# Altium PCB AirshipBoard.PcbDoc
Units mm, origin at the board's own origin, x right, y up, seen from the top; angles counter-clockwise.
Board outline 73.02 x 66.12 mm, 2 copper layers (Top Layer, Bottom Layer); 91 components, 95 nets, 394 pads, 108 vias.
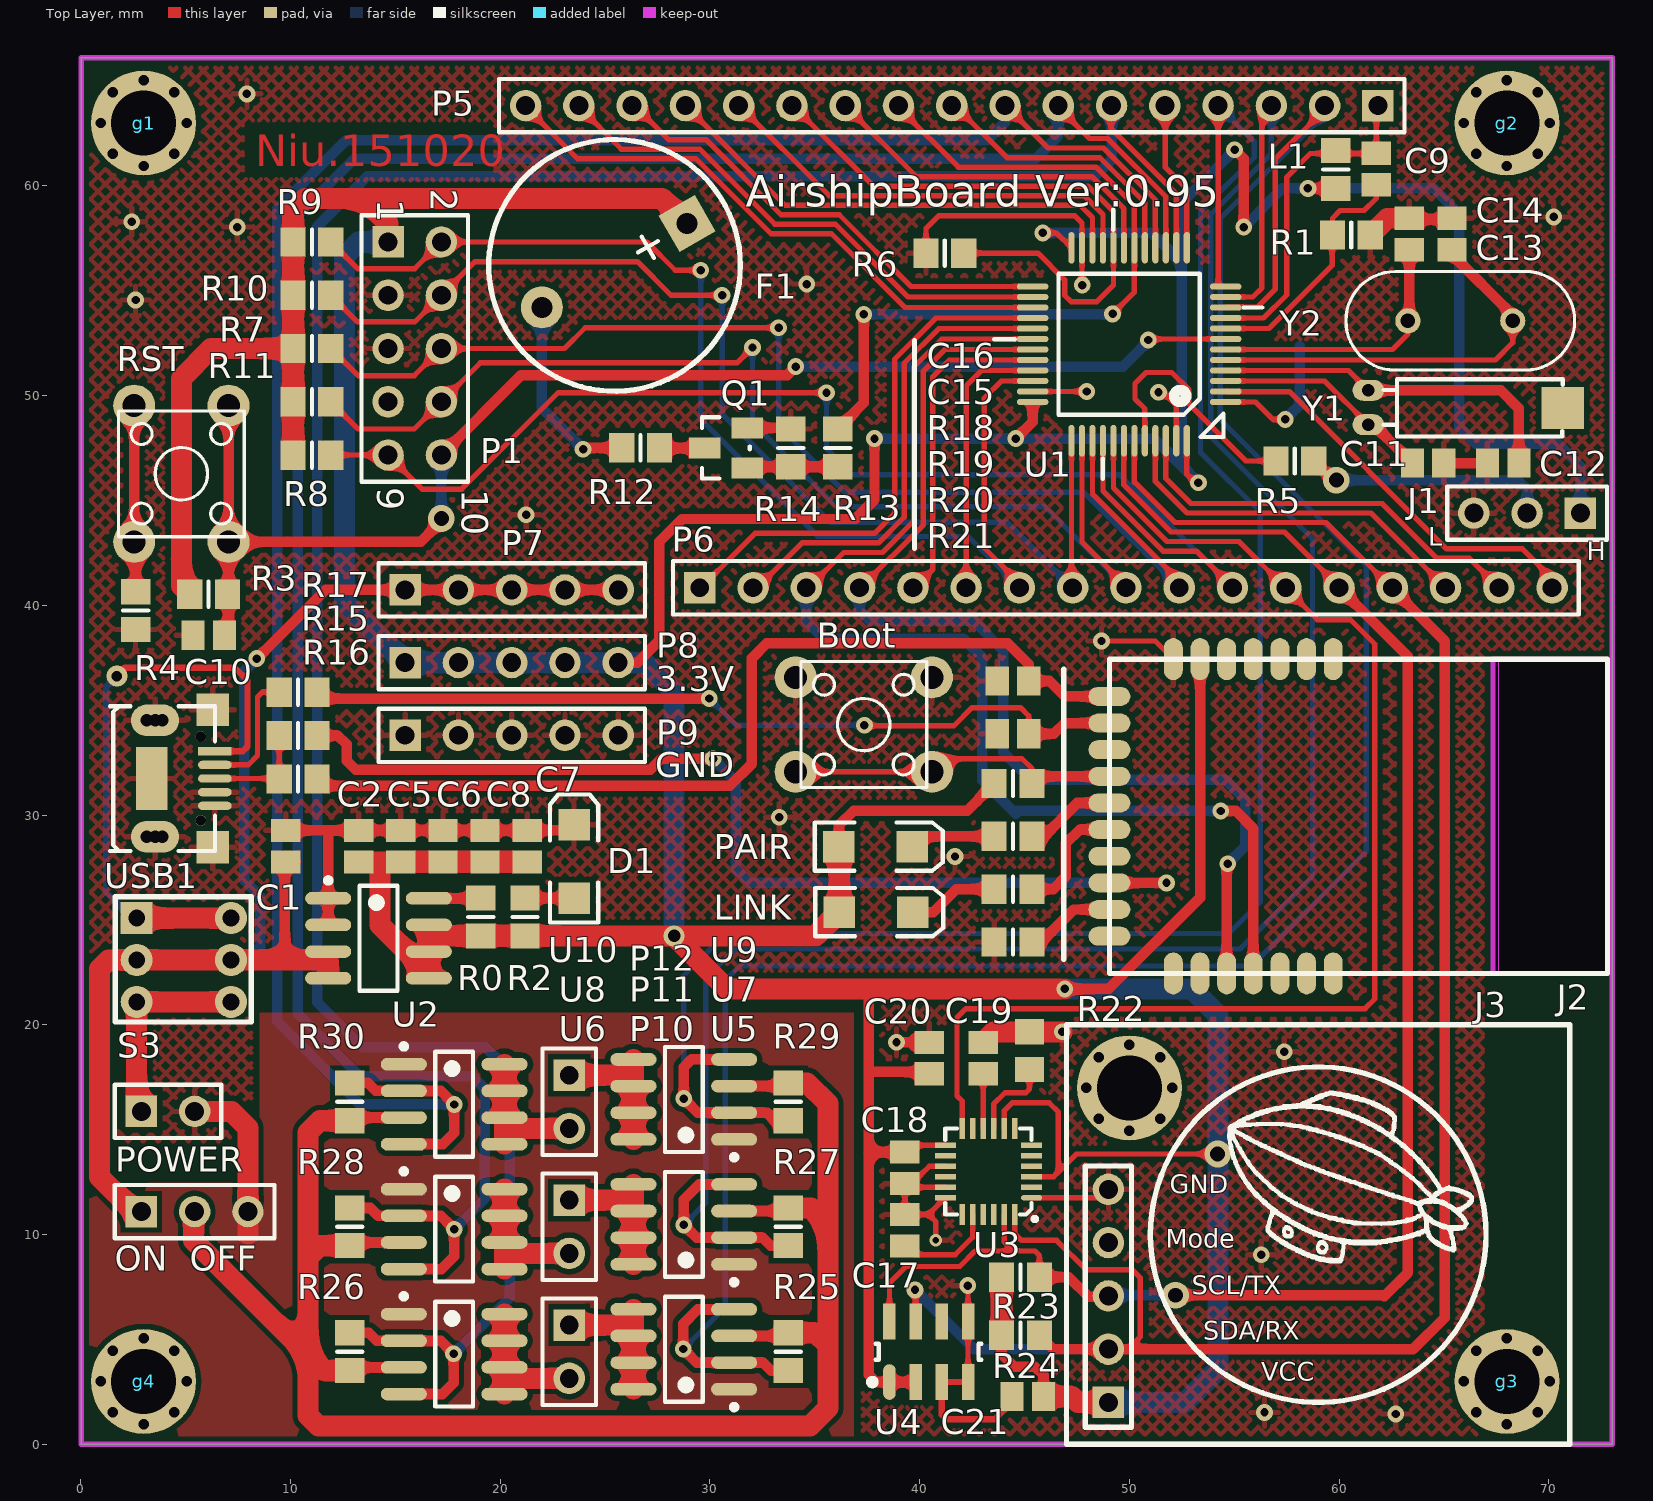
[diagram p0: Top Layer view]
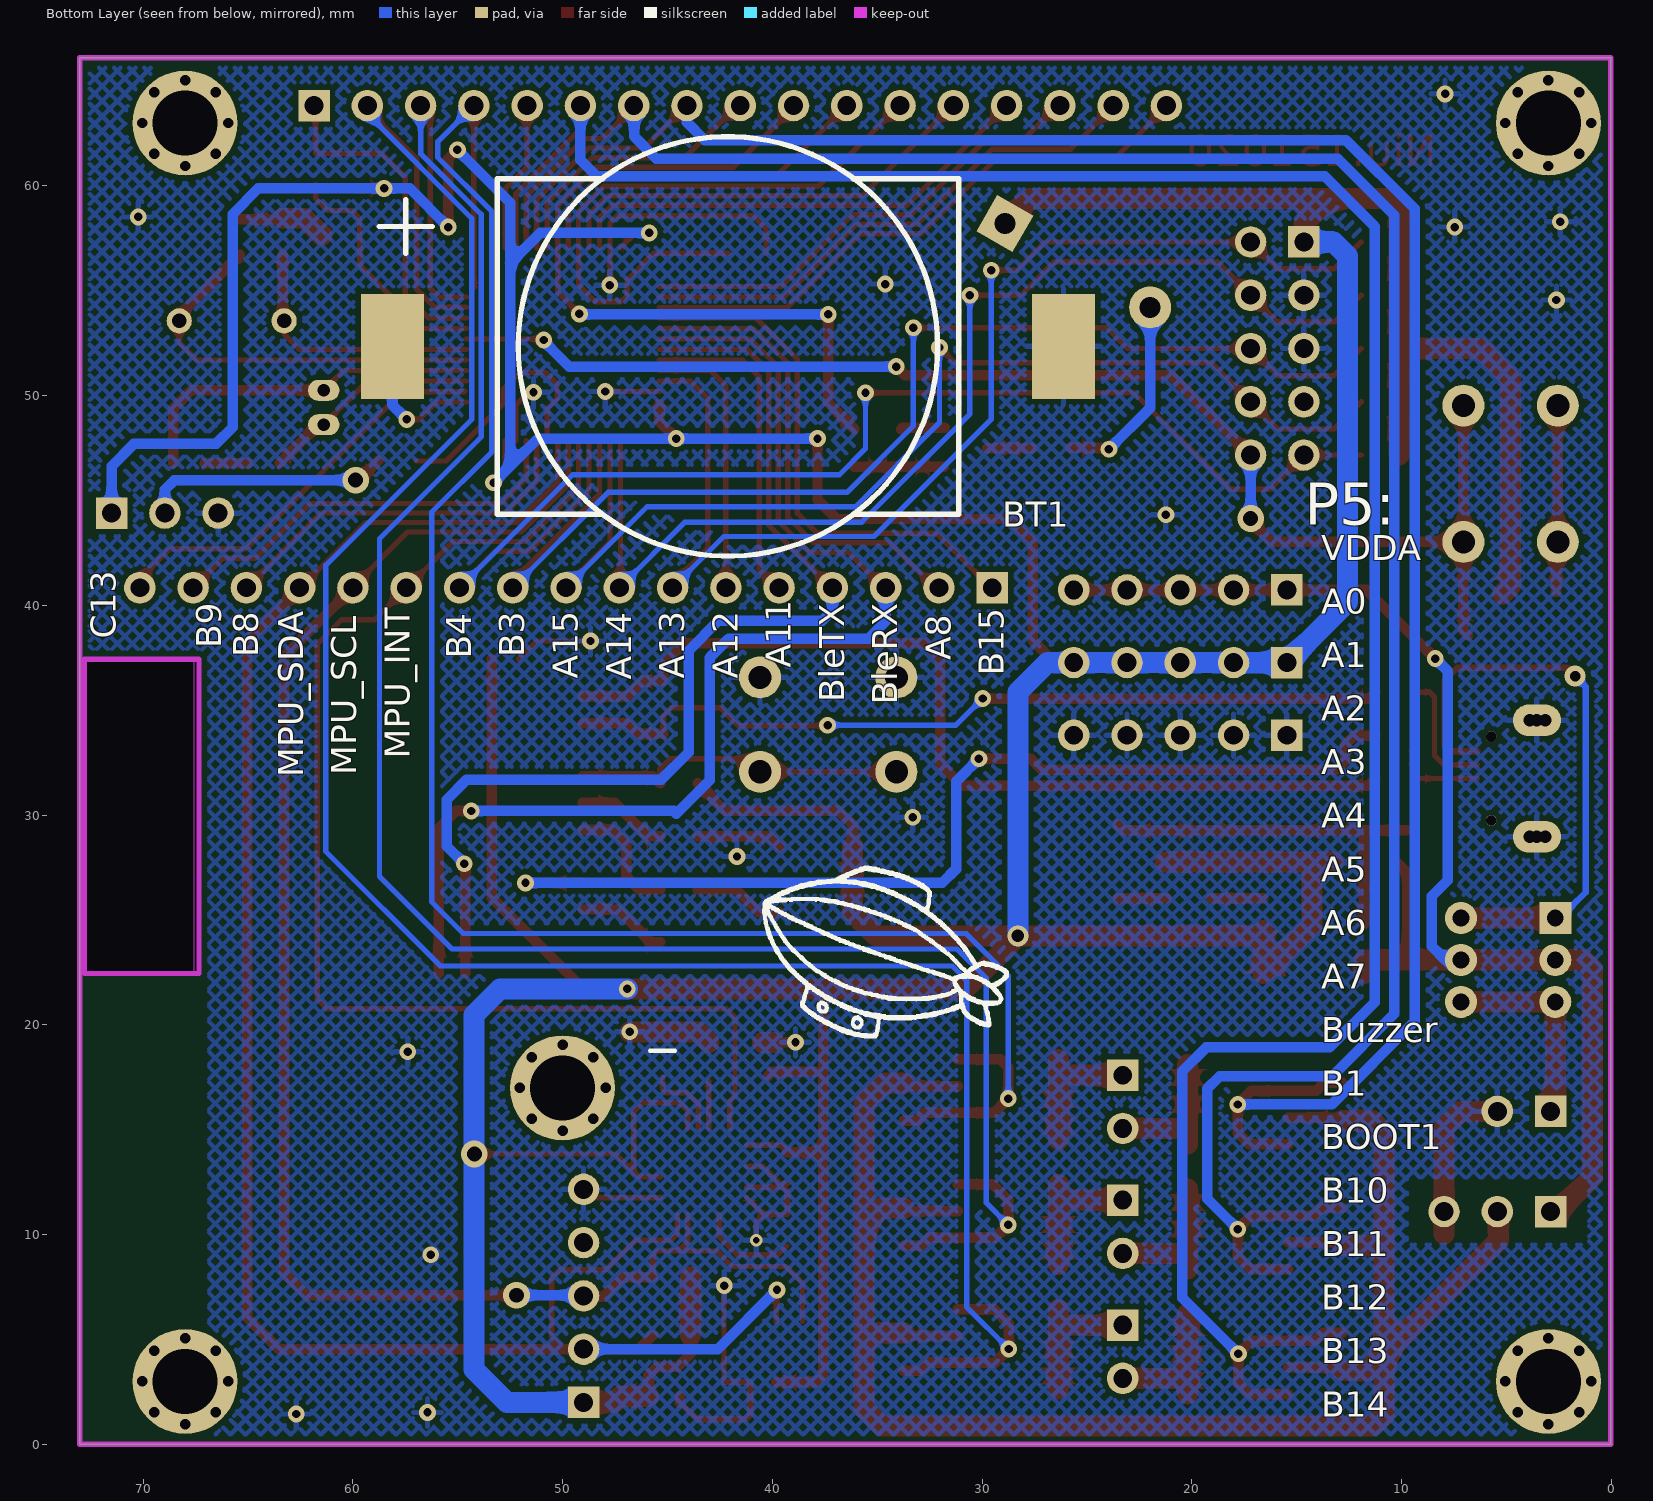
[diagram p1: Bottom Layer view, seen from below]

## Layer stack, top to bottom
Top Solder: solder mask 0.0102, Solder Resist, Dk 3.5
Top Layer: signal copper 0.0356
Dielectric 1: dielectric 0.32, FR-4, Dk 4.8
Bottom Layer: signal copper 0.0356
Bottom Solder: solder mask 0.0102, Solder Resist, Dk 3.5

## Board outline
0,0 0.025,0.025 0.025,66.116 73.025,66.116 73.025,0
cut-out: 67.589,37.44 67.589,22.454 73.05,22.454 73.05,37.44

## Design rules (kind name [scope] priority, off if disabled: settings)
Clearance [All] p1: gap=0.254
PolygonConnect [All] p1: connectstyle=Relief reliefconductorwidth=0.254 reliefentries=4 polygonreliefangle="90 Angle" airgapwidth=0.254
RoutingVias [All] p1: holewidth=0.4 width=0.8 viastyle="Through Hole" minholewidth=0.3 minwidth=0.6 maxholewidth=0.711 maxwidth=1.27
SolderMaskExpansion [All] p1: expansion=0.102
UnpouredPolygon [All] p1: allowunpoured=FALSE
Width 3.3 [InNet('3.3V')] p1: maxlimit=1 minlimit=0.254 preferedwidth=0.5
Width POWER [InNet('VCC','VCCM','VIN','5V-USB')] p2: maxlimit=1.5 minlimit=0.3 preferedwidth=1
Width Width_1 [All] p3: maxlimit=1.5 minlimit=0.254 preferedwidth=0.254
29 further rules are at their usual default settings.

## Components (designator, comment, footprint, x,y, rotation, side; value= is the part's Value field where it differs from the comment)
Boot "BOOT" SW-0606 40.335,31.318 r90 top (schematic designator S2)
BT1 "VBAT" BAT-SOT 58.115,52.349 r270 bottom
C1 "Cap Pol3" C0805 9.779,28.524 r90 top
C2 "Cap Pol3" C0805 13.259,28.524 r90 top
C5 "Cap Pol3" C0805 15.265,28.524 r90 top
C6 "Cap Pol3" C0805 17.272,28.524 r90 top
C7 "Cap Pol3" C0805 21.285,28.524 r90 top
C8 "Cap Pol3" C0805 19.279,28.524 r90 top
C9 "Cap Pol3" C0805 61.773,60.808 r270 top
C10 "Cap Pol3" C0805 6.096,38.583 r180 top
C11 "Cap Pol3" C0805 64.237,46.787 r0 top
C12 "Cap Pol3" C0805 67.818,46.787 r180 top
C13 "Cap Pol3" C0805 65.38,57.709 r90 top
C14 "Cap Pol3" C0805 63.348,57.709 r90 top
C15 "Cap Pol3" C0805 44.45,33.879 r180 top
C16 "Cap Pol3" C0805 44.45,36.398 r180 top
C17 "Cap Pol3" C0805 39.294,10.211 r90 top
C18 "Cap Pol3" C0805 39.294,13.183 r270 top
C19 "Cap Pol3" C0805 43.028,18.421 r90 top
C20 "Cap Pol3" C0805 40.462,18.421 r90 top
C21 "Cap Pol3" C0805 45.156,2.286 r180 top
D1 "Power" 3.2X1.6X1.1 23.52,27.788 r90 top
F1 "Buzzer" BELL 25.451,56.21 r30 top
g1 "固定过孔" HOLE_3MM-2#1 3,63 r0 top locked
g2 "固定过孔" HOLE_3MM-2#1 68,63 r0 top locked
g3 "固定过孔" HOLE_3MM-2#2 68,3 r0 top locked
g4 "固定过孔" HOLE_3MM-2#1 3,3 r0 top locked
J1 "Header 3" HDR1X3 71.501,44.399 r180 top
J2 "BleMicro" BleMicro 61.874,29.947 r270 top
J3 "SRF02" SRF02 71,20 r180 top locked
L1 "Inductor" 6-0805_N#1 59.842,60.782 r90 top
LINK "LINK" 3.2X1.6X1.1 37.922,25.375 r0 top (schematic designator D3)
"ON  OFF" "Header 3" HDR1X3 2.894,11.1 r0 top (schematic designator J4)
P1 "JTAG" HDR2X5 14.656,57.328 r270 top
P5 "Header 17" HDR1X17 61.849,63.83 r180 top
P6 "Header 17" HDR1X17 29.515,40.843 r0 top
P7 "Header 5" HDR1X5 15.469,40.742 r0 top
P8 "Header 5" HDR1X5 15.469,37.274 r0 top
P9 "Header 5" HDR1X5 15.469,33.807 r0 top
P10 "Motor1" HDR1X2 23.292,5.69 r270 top
P11 "Motor2" HDR1X2 23.292,11.646 r270 top
P12 "Motor3" HDR1X2 23.292,17.602 r270 top
PAIR "PAIR" 3.2X1.6X1.1 37.897,28.499 r0 top (schematic designator D2)
POWER "电源输入" HDR1X2 2.894,15.875 r0 top (schematic designator P2)
Q1 "8050" SOT-23(BEC-123) 29.743,47.498 r90 top
R0 "Res2" 6-0805_N#1 19.075,25.146 r90 top
R1 "Res2" 6-0805_N#1 60.579,57.658 r180 top
R2 "Res2" 6-0805_N#1 21.184,25.146 r90 top
R3 "Res2" 6-0805_N#1 6.096,40.538 r180 top
R4 "Res2" 6-0805_N#1 2.616,39.751 r90 top
R5 "Res2" 6-0805_N#1 57.887,46.888 r180 top
R6 "Res2" 6-0805_N#1 41.199,56.794 r0 top
R7 "Res2" 6-0805_N#1 11.024,52.248 r0 top
R8 "Res2" 6-0805_N#1 11.024,47.168 r0 top
R9 "Res2" 6-0805_N#1 11.024,57.328 r0 top
R10 "Res2" 6-0805_N#1 11.024,54.788 r0 top
R11 "Res2" 6-0805_N#1 11.024,49.708 r0 top
R12 "Res2" 6-0805_N#1 26.695,47.51 r0 top
R13 "Res2" 6-0805_N#1 36.093,47.51 r270 top
R14 "Res2" 6-0805_N#1 33.858,47.51 r90 top
R15 "Res2" 6-0805_N#1 10.363,33.795 r0 top
R16 "Res2" 6-0805_N#1 10.363,31.725 r0 top
R17 "Res2" 6-0805_N#1 10.363,35.865 r0 top
R18 "Res2" 6-0805_N#1 44.45,31.51 r180 top
R19 "Res2" 6-0805_N#1 44.45,28.991 r180 top
R20 "Res2" 6-0805_N#1 44.45,26.471 r180 top
R21 "Res2" 6-0805_N#1 44.45,23.952 r180 top
R22 "Res2" 6-0805_N#2 45.237,18.771 r270 top
R23 "Res2" 6-0805_N#1 44.806,7.976 r0 top
R24 "Res2" 6-0805_N#1 44.806,5.206 r0 top
R25 "Res2" 6-0805_N#1 33.731,4.42 r90 top
R26 "Res2" 6-0805_N#1 12.827,4.42 r90 top
R27 "Res2" 6-0805_N#1 33.731,10.376 r90 top
R28 "Res2" 6-0805_N#1 12.827,10.376 r90 top
R29 "Res2" 6-0805_N#1 33.731,16.332 r90 top
R30 "Res2" 6-0805_N#1 12.827,16.332 r90 top
RST "RST" SW-0606 7.798,49.276 r180 top (schematic designator S1)
S3 "电源开关" 自锁开关-5.8*5.8 2.667,25.095 r0 top
U1 "STM32F103CBT6" LQFP48 49.987,52.451 r180 top
U2 "TPS7333-8" TPS73XX-8 14.199,24.13 r0 top
U3 "MPU9150" LCC24 43.332,13.03 r180 top
U4 "MS5611" LCC8 38.557,2.972 r90 top
U5 "SP8M4" TPS73XX-8 28.753,4.535 r180 top
U6 "SP8M4" TPS73XX-8 17.805,4.305 r0 top
U7 "SP8M4" TPS73XX-8 28.753,10.491 r180 top
U8 "SP8M4" TPS73XX-8 17.805,10.261 r0 top
U9 "SP8M4" TPS73XX-8 28.753,16.447 r180 top
U10 "SP8M4" TPS73XX-8 17.805,16.217 r0 top
USB1 "MicroUSB" MICROUSB_D2S6 4.365,31.902 r90 top
Y1 "32.768K" OSC_3X8d 61.392,48.616 r0 top
Y2 "8M" XTAL-HC49S 68.275,53.569 r180 top

## Footprints (in the part's own frame and the unit in brackets; to place one, negate y for a bottom-side part, rotate by r counter-clockwise, add the part's x,y. Pads: shape width x height; smd on the part's side, far side on the other; paste and mask are expansions set on the pad)
3.2X1.6X1.1 [mm] "SMT LED; 2 Flat Leads"
  rect 1.5x1.5 smd: 1(-1.75,0) 2(1.75,0)
  silkscreen extent -2.9,-1.15 3.2,1.15
6-0805_N#1 [mm] "Chip Resistor, Body 2.0x1.2mm, IPC Medium Density"
  rect 1.2x1.4 smd: 1(-0.9,0) 2(0.9,0)
  silkscreen extent 0,-0.6 0,0.6, body extent -1.07,-0.7 1.07,0.7, height 0.7
6-0805_N#2 [mm] "Chip Resistor, Body 2.0x1.2mm, IPC Medium Density"
  rect 1.2x1.4 smd: 1(0.9,0) 2(-0.9,0)
  body extent -1.07,-0.7 1.07,0.7, height 0.7
BAT-SOT [mm] "贴片封装"
  rect 5x3 smd: 1(0,0) 2(0,32)
  silkscreen extent -10,-0.63 10,27
BELL [mm]
  rect 2x2 hole 1: 1(4,0)
  round 2 hole 1: 2(-4,0)
  silkscreen extent -6,-6 6,6, body extent -6,-5.94 6,6.06, height 9.3
BleMicro [mm]
  oval 2x0.9 smd: 1(-7.493,-2.159) 2(-7.493,-3.429) 3(-7.493,-4.699) 4(-7.493,-5.969) 5(-7.493,-7.239) 6(-7.493,-8.509) 7(-7.493,-9.779) 18(7.493,-9.779) 19(7.493,-8.509) 20(7.493,-7.239) 21(7.493,-5.969) 22(7.493,-4.699) 23(7.493,-3.429) 24(7.493,-2.159)
  oval 0.9x2 smd: 8(-5.715,-12.827) 9(-4.445,-12.827) 10(-3.175,-12.827) 11(-1.905,-12.827) 12(-0.635,-12.827) 13(0.635,-12.827) 14(1.905,-12.827) 15(3.175,-12.827) 16(4.445,-12.827) 17(5.715,-12.827)
  Keep-Out Layer board cut-out: -7.493,10.922 -7.493,5.461 7.493,5.461 7.493,10.922
  Keep-Out Layer lines w0.254: 7.493,5.461 7.493,10.922 -7.493,10.922 -7.493,5.461 7.493,5.461
  silkscreen extent -7.49,-12.83 7.49,10.92
C0805 [mm] "Chip Capacitor, Body 2.0x1.3mm, IPC High Density"
  rect 1.1x1.4 smd: 1(-0.75,0) 2(0.75,0)
  body extent -1.1,-0.72 1.1,0.72, height 1.4
HDR1X2 [mm] "Connector; Header; 2 Position"
  rect 1.5x1.5 hole 0.9: 1(0,0)
  round 1.5 hole 0.9: 2(2.54,0)
  silkscreen extent -1.27,-1.27 3.81,1.27
HDR1X3 [mm] "Connector; Header; 3 Position"
  rect 1.5x1.5 hole 0.9: 1(0,0)
  round 1.5 hole 0.9: 2(2.54,0) 3(5.08,0)
  silkscreen extent -1.27,-1.27 6.35,1.27
HDR1X5 [mm] "Connector; Header; 5 Position"
  rect 1.5x1.5 hole 0.9: 1(0,0)
  round 1.5 hole 0.9: 2(2.54,0) 3(5.08,0) 4(7.62,0) 5(10.16,0)
  silkscreen extent -1.27,-1.27 11.43,1.27
HDR1X17 [mm] "Connector; Header; 17 Position"
  rect 1.5x1.5 hole 0.9: 1(0,0)
  round 1.5 hole 0.9: 2(2.54,0) 3(5.08,0) 4(7.62,0) 5(10.16,0) 6(12.7,0) 7(15.24,0) 8(17.78,0) 9(20.32,0) 10(22.86,0) 11(25.4,0) 12(27.94,0) 13(30.48,0) 14(33.02,0) 15(35.56,0) 16(38.1,0) 17(40.64,0)
  silkscreen extent -1.27,-1.27 41.91,1.27
HDR2X5 [mm] "Connector; Header; 5x2 Position"
  rect 1.5x1.5 hole 0.9: 1(0,0)
  round 1.5 hole 0.9: 2(0,2.54) 3(2.54,0) 4(2.54,2.54) 5(5.08,0) 6(5.08,2.54) 7(7.62,0) 8(7.62,2.54) 9(10.16,0) 10(10.16,2.54)
  silkscreen extent -1.27,-1.27 11.43,3.81
HOLE_3MM-2#1 [mm]
  round 5 hole 3.1: 1(0,0)
HOLE_3MM-2#2 [mm]
  round 5 hole 3.1: ""(0,0)
LCC8 [mm]
  oval 1.7x0.6 smd: 1(0,0)
  rect 1.7x0.6 smd: 2(0,-1.25) 3(0,-2.5) 4(0,-3.75) 5(2.886,-3.75) 6(2.886,-2.5) 7(2.886,-1.25) 8(2.886,0)
  Top Layer pour cut-out: 0,0 0,-3.81 2.921,-3.81 2.921,0
  silkscreen extent -0.15,-4.39 1.83,0.96
LCC24 [mm]
  oval 1x0.25 smd: 1(-2.001,1.27)
  rect 1x0.25 smd: 2(-2.001,0.77) 3(-2.001,0.27) 4(-2.001,-0.23) 5(-2.001,-0.73) 6(-2.001,-1.23) 13(2.109,-1.23) 14(2.109,-0.73) 15(2.109,-0.23) 16(2.109,0.27) 17(2.109,0.77) 18(2.109,1.27)
  rect 0.25x1 smd: 7(-1.196,-2.035) 8(-0.696,-2.035) 9(-0.196,-2.035) 10(0.304,-2.035) 11(0.804,-2.035) 12(1.304,-2.035) 19(1.304,2.075) 20(0.804,2.075) 21(0.304,2.075) 22(-0.196,2.075) 23(-0.696,2.075) 24(-1.196,2.075)
  Top Layer pour cut-out: -1.446,2.075 -2.001,1.52 -2.001,-1.48 -1.446,-2.035 -1.446,-2.035 1.554,-2.035 2.109,-1.48 2.109,1.52 1.554,2.075
  silkscreen extent -2.26,-2.03 2.11,2.39
LQFP48 [mm]
  oval 1.5x0.3 smd: 1(-4.6,2.75) 2(-4.6,2.25) 3(-4.6,1.75) 4(-4.6,1.25) 5(-4.6,0.75) 6(-4.6,0.25) 7(-4.6,-0.25) 8(-4.6,-0.75) 9(-4.6,-1.25) 10(-4.6,-1.75) 11(-4.6,-2.25) 12(-4.6,-2.75) 25(4.6,-2.75) 26(4.6,-2.25) 27(4.6,-1.75) 28(4.6,-1.25) 29(4.6,-0.75) 30(4.6,-0.25) 31(4.6,0.25) 32(4.6,0.75) 33(4.6,1.25) 34(4.6,1.75) 35(4.6,2.25) 36(4.6,2.75)
  oval 0.3x1.5 smd: 13(-2.75,-4.6) 14(-2.25,-4.6) 15(-1.75,-4.6) 16(-1.25,-4.6) 17(-0.75,-4.6) 18(-0.25,-4.6) 19(0.25,-4.6) 20(0.75,-4.6) 21(1.25,-4.6) 22(1.75,-4.6) 23(2.25,-4.6) 24(2.75,-4.6) 37(2.75,4.6) 38(2.25,4.6) 39(1.75,4.6) 40(1.25,4.6) 41(0.75,4.6) 42(0.25,4.6) 43(-0.25,4.6) 44(-0.75,4.6) 45(-1.25,4.6) 46(-1.75,4.6) 47(-2.25,4.6) 48(-2.75,4.6)
  silkscreen extent -6.35,-6.42 6.44,6.42, body extent -4.53,-4.51 4.5,4.51, height 1.75
MICROUSB_D2S6 [mm]
  round 0.5 hole 0.5: 0(-2.157,-1.357) 0(1.843,-1.357)
  rect 0.4x1.6 smd: 1(1.143,-2.032)
  oval 0.4x1.6 smd: 2(0.493,-2.032) 3(-0.157,-2.032) 4(-0.807,-2.032) 5(-1.457,-2.032)
  rect 1.55x1.55 smd: 6(-3.429,-1.929) 6(3.124,-1.929)
  round 0.8 hole 0.6: 6(-2.932,0.468) 6(-2.932,1.218) 6(2.618,0.468) 6(2.618,1.218)
  oval 1.5x2.3 hole 0.6: 6(-2.932,0.818) 6(2.618,0.818)
  rect 3x1.5 smd: 6(-0.157,0.968)
  silkscreen extent -3.61,-2.03 3.29,2.97
OSC_3X8d [mm]
  oval 1.5x1 hole 0.6: 1(0,0) 2(0,1.64)
  rect 2.032x2 smd: 3(9.271,0.787)
  silkscreen extent 0.74,-0.56 9.27,2.17
SOT-23(BEC-123) [mm]
  rect 1x1.5 smd: B(-0.941,-2.032) C(0,0) E(0.964,-2.032)
  Top Layer pour cut-out: 1.25,0.4 1.25,-2.65 -1.3,-2.65 -1.3,0.4
  silkscreen extent -1.45,-2.16 1.47,0.13, body extent -1.45,-2.42 1.45,0.38, height 1.2
SRF02 [mm]
  rect 1.5x1.5 hole 0.9: 1(22,18)
  round 1.5 hole 0.9: 2(22,15.46) 3(22,12.92) 4(22,10.38) 5(22,7.84)
  round 5 hole 3.1: ""(3,17) ""(21,3)
  silkscreen extent 0,0 24,20
SW-0606 [mm]
  round 2 hole 1.1: 1(0.75,-0.25) 1(0.75,6.25) 2(5.25,6.25) 2(5.25,-0.25)
  silkscreen extent 0,0 6,6, body extent -0.25,-1.13 6.25,7.13, height 5
TPS73XX-8 [mm] "SOIC, 8-Leads, Body 4.9x3.9mm, Pitch 1.27mm, IPC Medium Density"
  oval 2.2x0.6 smd: 1(-2.4,1.905) 2(-2.4,0.635) 3(-2.4,-0.635) 4(-2.4,-1.905) 5(2.4,-1.905) 6(2.4,-0.635) 7(2.4,0.635) 8(2.4,1.905)
  silkscreen extent -2.52,-2.5 0.9,2.88, body extent -2,-2.5 2,2.5, height 1.75
XTAL-HC49S [mm]
  round 1.2 hole 0.7: 1(0,0) 2(5,0)
  silkscreen extent -2.95,-2.35 7.95,2.35, body extent -3.18,-2.32 8.18,2.33, height 3.5
自锁开关-5.8*5.8 [mm]
  rect 1.524x1.524 hole 0.8: 1(0,0)
  round 1.524 hole 0.8: 2(0,-2) 3(0,-4) 4(4.5,-4) 5(4.5,-2) 6(4.5,0)
  silkscreen extent -1.02,-4.95 5.46,1.02

## Part data
Boot RST: library part SW-PB, "Switch"
BT1: library part BAT, "Battery/VBAT"
C1 C2 C5 C6 C7 C8 C9 C10 C11 C12 C13 C14 C15 C16 C17 C18 C19 C20 C21: "Polarized Capacitor (Surface Mount)"
D1 LINK PAIR: library part LED2, "Typical RED, GREEN, YELLOW, AMBER GaAs LED"
F1: library part BELL
g1 g2 g3 g4: library part g固定过孔
J1 "ON  OFF": "Header, 3-Pin"
P1: library part "Header 5X2", "Header, 5-Pin, Dual row"
P5 P6: "Header, 17-Pin"
P7 P8 P9: "Header, 5-Pin"
P10 P11 P12 POWER: library part "Header 2", "USART"
Q1: library part NPN
R0 R1 R2 R3 R4 R5 R6 R7 R8 R9 R10 R11 R12 R13 R14 R15 R16 R17 R18 R19 R20 R21 R22 R23 R24 R25 R26 R27 R28 R29 R30: "Resistor"
S3: library part 自锁开关
U1: library part STM32F103C8T6, "LQFP48"
U2: library part TPS73XX-8
USB1: library part USB, "USB"
Y1 Y2: library part J晶振-3

## Via types
v1: diameter 0.8, hole 0.4, Top Layer to Bottom Layer, 53 vias
v2: diameter 0.6, hole 0.5, Top Layer to Bottom Layer, 48 vias
v3: diameter 1.27, hole 0.711, Top Layer to Bottom Layer, 4 vias
v4: diameter 1, hole 0.6, Top Layer to Bottom Layer, 1 vias
v5: diameter 1, hole 0.5, Top Layer to Bottom Layer, 1 vias
v6: diameter 0.6, hole 0.3, Top Layer to Bottom Layer, 1 vias

## Nets (pads, with @x,y where several pads share a name; then routed paths per layer and width w, separated by ;. In a path a pad name is that pad's centre, name@x,y a point inside that pad or via, vN(x,y) a via of type N, cw(c..) or ccw(c..) an arc to the next point about the centre after c; other vN are vias at no path point)
3.3V: C2.1 C5.1 C6.1 C7.1 C8.1 C18.1 C20.1 C21.1 F1.1 J1.1 J2.6 J3.1 L1.1 LINK.1 P1.1 P8.1 P8.2 P8.3 P8.4 P8.5 PAIR.1 R0.1 R2.1 R3.2 R7.1 R8.1 R9.1 R10.1 R11.1 R18.2 R23.1 R24.1 U1.24 U1.36 U1.48 U2.5 U2.6 U2.7 U3.3 U3.8 U3.13 U4.1 U4.2 | length 373.4
  Top Layer w0.254: C18.1@39.243,13.933 39.571,14.26 U3.13 ; U3.8 44.028,15.9 44.409,16.281 46.177,16.281 46.609,15.85 46.609,12.979 ; U3.3 46.39,12.76 46.609,12.979 ; v1(45.872,57.76) 46.529,57.76 U1.24 ; U1.48 52.737,46.247 53.137,45.847 v1(53.289,45.847) ; v3(54.204,13.843) 47.473,13.843 46.609,12.979
  Top Layer w0.5: P8.5 26.53,37.274 27.584,38.329 27.584,43.028 28.677,44.12 36.932,44.12 37.846,45.034 v1(37.846,47.955) ; PAIR.1 36.147,29.517 36.847,30.218 42.258,30.218 R18.2 ; 37.694,21.717 37.567,21.59 37.567,13.933 ; 37.821,17.755 40.023,17.755 C20.1@40.2,17.577 ; C18.1 39.243,13.933 37.567,13.933 ; U4.2 U4.1 37.922,2.972 37.567,3.327 37.567,13.933 ; R24.1 43.906,4.304 44.501,3.708 45.491,3.708 45.906,3.294 C21.1 ; v1(44.577,47.955) 45.387,48.765 U1.36@45.387,49.59 ; v1(46.914,21.717) 49.022,21.717 53.365,26.06 J2.6 ; v1(55.016,61.722) 55.448,61.29 v1(55.448,58.039) ; v1(58.511,59.882) L1.1
  Top Layer w1: R3.2 4.801,40.934 4.801,50.825 6.223,52.248 R7.1 ; R8.1 R11.1 R7.1 ; 10.124,56.148 R9.1 ; C2.1 14.275,27.774 ; P1.1 14.656,58.217 13.462,59.411 ; U2.7@16.599,24.511 U2.6 16.599,22.441 14.275,24.765 14.275,27.774 ; 17.107,24.257 17.118,24.246 R0.1 R2.1 35.044,24.246 LINK.1 36.172,28.473 PAIR.1 ; C7.1 C8.1 C6.1 C5.1 14.275,27.774 ; v4@28.281,24.246 30.81,21.717 37.694,21.717 v1(46.914,21.717) ; F1.1 27.715,59.411 13.462,59.411 ; R24.1 R23.1 ; C21.1 47.269,2.286 47.555,2 J3.1 ; R7.1 R10.1 R9.1 ; R9.1 10.124,58.841 10.693,59.411 13.462,59.411
  Bottom Layer w0.5: v1(37.846,47.955) v1(44.577,47.955) 51.181,47.955 52.502,46.634 ; v1(45.872,57.76) 51.054,57.76 52.502,56.312 ; v1(53.289,45.847) 52.502,46.634 ; v1(55.016,61.722) 52.502,59.207 52.502,56.312 ; v1(55.448,58.039) 57.291,59.882 v1(58.511,59.882) 64.502,59.882 65.735,58.649 65.735,48.489 66.523,47.701 70.434,47.701 71.501,46.634 J1.1@71.501,44.323 ; 52.502,46.634 52.502,56.312
  Bottom Layer w1: P1.1 13.233,57.328 12.573,56.667 12.573,40.17 P8.1 P8.2 P8.3 P8.4 P8.5 26.886,37.274 28.296,35.865 v4(28.296,24.246) ; v1(46.914,21.717) 52.984,21.717 54.229,20.472 54.229,3.581 52.648,2 J3.1
5V_USB: S3.1 S3.6 USB1.1 | length 28.2
  Top Layer w0.3: v5(1.727,36.627) 1.727,36.678 2.083,37.033 7.341,37.033 7.95,36.424 7.95,33.274 7.722,33.045 USB1.1
  Top Layer w1: S3.1@2.44,25.095 S3.6@6.94,25.095
  Bottom Layer w0.3: v5(1.727,36.627) 1.219,36.119 1.219,26.316 S3.1@2.44,25.095
A0: P5.2 R25.1 U1.10 U5.2 U5.4 | length 113.8
  Top Layer w0.254: U1.10 54.61,54.224 56.104,54.224 56.947,55.067 56.947,61.29 59.36,63.703 P5.2@59.36,63.805
  Top Layer w0.5: U5.4 29.427,6.44 28.727,5.74 v1(28.727,4.547) 29.374,3.9 U5.2 32.549,3.9 32.929,3.52 R25.1
  Bottom Layer w0.254: v1(28.727,4.547) 30.734,6.553 30.734,22.123 31.42,22.809 55.829,22.809 61.29,28.27 61.29,41.91 54.331,48.87 54.331,58.457 59.309,63.435 P5.2
A1: P5.3 R27.1 U1.11 U7.2 U7.4 | length 103.2
  Top Layer w0.254: U1.11 55.88,54.701 56.312,55.133 56.312,63.373 P5.3 ; P5.3@56.794,63.83 P5.3@56.794,63.881
  Top Layer w0.5: U7.4 29.49,12.396 28.753,11.659 v1(28.753,10.465) 29.362,9.856 U7.2 32.511,9.856 32.891,9.476 R27.1
  Bottom Layer w0.254: v1(28.753,10.465) 29.794,11.506 29.794,22.225 31.191,23.622 55.27,23.622 58.725,27.076 58.725,43.18 53.877,48.028 53.877,58.645 56.769,61.537 P5.3
A2: P5.4 R29.1 U1.12 U9.2 U9.4 | length 93.9
  Top Layer w0.254: U1.12@54.178,55.194 54.229,55.245 P5.4
  Top Layer w0.5: U9.4 29.122,18.352 28.753,17.983 v1(28.753,16.485) 29.425,15.812 U9.2 32.727,15.812 33.107,15.432 R29.1
  Bottom Layer w0.254: v1(28.753,16.485) 28.753,22.352 30.759,24.359 54.737,24.359 56.236,25.857 56.236,44.45 53.391,47.295 53.391,58.801 55.956,61.366 55.956,62.103 P5.4
A3: P5.5 U1.13 | length 7.2
  Top Layer w0.254: P5.5@51.714,63.779 51.714,60.884 52.737,59.861 U1.13
A4: P5.6 R26.2 U1.14 U6.2 U6.4 | length 121.4
  Top Layer w0.254: P5.6@49.124,63.957 49.124,62.738 52.237,59.624 U1.14
  Top Layer w0.5: R26.2 13.73,5.32 14.11,4.94 U6.2 17.158,4.94 v1(17.78,4.318) 17.78,2.946 17.233,2.4 U6.4
  Bottom Layer w0.5: v1(17.78,4.318) 20.447,6.985 20.447,17.78 19.304,18.923 13.437,18.923 11.278,21.082 11.278,58.064 13.665,60.452 48.362,60.452 49.149,61.239 P5.6
A5: P5.7 R28.2 U1.15 U8.2 U8.4 | length 113.8
  Top Layer w0.254: P5.7@46.584,63.779 48.105,62.258 48.961,62.258 51.737,59.482 U1.15
  Top Layer w0.5: R28.2 13.794,11.276 14.174,10.896 U8.2 17.171,10.896 v1(17.805,10.262) 17.805,8.966 17.195,8.356 U8.4
  Bottom Layer w0.5: v1(17.805,10.262) 19.253,11.709 19.253,16.967 18.669,17.551 13.31,17.551 10.338,20.523 10.338,58.598 13.041,61.301 45.528,61.301 46.584,62.357 46.584,63.805 P5.7
A6: P5.8 R30.2 U1.16 U10.2 U10.4 | length 106.8
  Top Layer w0.254: P5.8@43.993,63.932 46.12,61.804 48.773,61.804 51.237,59.34 U1.16
  Top Layer w0.5: R30.2 13.68,17.232 14.06,16.852 U10.2 17.158,16.852 v1(17.805,16.205) 17.805,14.859 17.259,14.312 U10.4
  Bottom Layer w0.5: v1(17.805,16.205) 13.335,16.205 9.373,20.168 9.373,58.903 12.649,62.179 43.22,62.179 44.069,63.029 P5.8
A7: P5.9 U1.17 | length 13.3
  Top Layer w0.254: P5.9@41.554,63.957 44.161,61.35 48.585,61.35 50.737,59.198 U1.17
A8: P6.2 U1.29 | length 22.8
  Top Layer w0.254: P6.2@32.08,40.665 34.395,42.98 38.034,42.98 39.265,44.211 39.265,51.552 40.914,53.201 U1.29
A11: P6.5 U1.32 | length 15.5
  Top Layer w0.254: P6.5@39.7,40.996 39.903,40.996 40.627,41.719 40.627,50.914 41.414,51.701 U1.32
A12: P6.6 U1.33 | length 13.3
  Top Layer w0.254: P6.6@42.215,40.665 P6.6 42.215,50.47 42.946,51.201 U1.33
A13: P1.2 P6.7 R9.2 U1.34 | length 57.1
  Top Layer w0.254: R9.2 13.194,56.058 15.926,56.058 P1.2 27,57.328 28.346,55.982 v1(29.566,55.982) ; P6.7@44.679,40.996 44.679,41.148 43.078,42.748 43.078,49.886 43.894,50.701 U1.34
  Bottom Layer w0.254: v1(29.566,55.982) 29.566,48.87 35.154,43.282 42.316,43.282 P6.7
A14: P1.4 P6.8 R10.2 U1.37 | length 53.7
  Top Layer w0.254: R10.2 13.194,53.518 15.926,53.518 P1.4 18.796,56.388 26.543,56.388 28.143,54.788 v1(30.582,54.788) ; U1.37 47.237,41.129 P6.8@47.32,41.046
  Bottom Layer w0.254: v1(30.582,54.788) 30.582,49.124 35.738,43.967 44.171,43.967 P6.8
A15: P1.8 P6.9 R11.2 U1.38 | length 54.6
  Top Layer w0.254: R11.2 13.219,48.412 15.9,48.412 P1.8 19.05,51.562 31.293,51.562 v1(32.029,52.299) ; U1.38 47.737,43.017 P6.9@49.784,40.97
  Bottom Layer w0.254: v1(32.029,52.299) 32.029,48.717 36.043,44.704 45.974,44.704 P6.9
B1: P5.11 U1.19 | length 17.3
  Top Layer w0.254: P5.11@36.373,63.906 P5.11 39.837,60.442 48.209,60.442 49.737,58.914 U1.19
B3: P1.6 P6.10 R7.2 U1.39 | length 58.7
  Top Layer w0.254: R7.2 13.219,50.952 15.9,50.952 P1.6 23.063,52.248 24.054,53.238 v1(33.274,53.238) ; U1.39 48.237,45.311 52.502,41.046 P6.10@52.502,40.767
  Bottom Layer w0.254: v1(33.274,53.238) 33.274,48.565 36.449,45.39 47.828,45.39 P6.10
B4: P1.9 P6.11 R8.2 U1.40 | length 61.5
  Top Layer w0.254: R8.2 P1.9 16.281,45.542 18.161,45.542 22.758,50.14 v1(35.56,50.14) ; U1.40 48.737,45.453 51.601,42.59 53.194,42.59 P6.11@54.966,40.818
  Bottom Layer w0.254: v1(35.56,50.14) 35.56,47.473 36.805,46.228 49.53,46.228 P6.11
B8: P6.15 U1.45 | length 17.9
  Top Layer w0.254: U1.45 51.237,45.911 52.742,44.406 61.512,44.406 P6.15
B9: P6.16 U1.46 | length 19.8
  Top Layer w0.254: U1.46 51.737,46.053 52.93,44.86 62.049,44.86 64.665,42.243 66.215,42.243 P6.16
B10: P5.13 U1.21 | length 21.3
  Top Layer w0.254: P5.13@31.267,63.957 35.69,59.534 47.833,59.534 48.737,58.63 U1.21
B11: P5.14 U1.22 | length 23.1
  Top Layer w0.254: P5.14@28.778,63.881 P5.14 33.579,59.08 47.645,59.08 48.237,58.488 U1.22
B12: P5.15 U1.25 | length 22.7
  Top Layer w0.254: P5.15@26.314,63.881 26.347,63.881 28.023,62.205 29.813,62.205 33.391,58.626 36.166,58.626 39.592,55.201 U1.25
B13: P5.16 U1.26 | length 25.4
  Top Layer w0.254: P5.16@23.749,63.779 25.778,61.751 29.518,61.751 33.096,58.172 35.978,58.172 39.45,54.701 U1.26
B14: P5.17 U1.27 | length 28.3
  Top Layer w0.254: P5.17@21.107,63.881 23.692,61.297 29.33,61.297 32.908,57.718 35.79,57.718 39.308,54.201 U1.27
B15: P6.1 U1.28 | length 25.5
  Top Layer w0.254: P6.1@29.54,40.818 32.156,43.434 37.846,43.434 38.811,44.399 38.811,51.74 40.772,53.701 U1.28
BLEP0.0: J2.23
BLEP0.1: J2.22
BLEP0.4: J2.19
BLEP0.5: J2.18
BLEP0.6: J2.17
BLEP0.7: J2.16 R21.1 | length 4.3
  Top Layer w0.5: R21.1 45.796,23.952 47.346,25.502 J2.16
BLEP1.0: J2.15 R15.2 | length 49.5
  Top Layer w0.5: R15.2 12.255,33.795 12.675,33.376 12.675,32.588 13.106,32.156 27.153,32.156 27.686,32.69 v1(30.15,32.69) ; J2.15 v1(51.765,26.772)
  Bottom Layer w0.5: v1(30.15,32.69) 31.242,31.598 31.242,27.432 31.902,26.772 v1(51.765,26.772)
BLEP1.1: J2.14
BLEP1.2: J2.13 R20.1 | length 5.8
  Top Layer w0.5: R20.1 46.36,26.471 46.965,27.076 46.965,28.651 47.625,29.312 J2.13
BLEP1.3: J2.12 R19.1 | length 4.4
  Top Layer w0.5: R19.1 45.932,28.991 47.523,30.582 J2.12
BLEP1.4: Boot.1 J2.11 R18.1 | length 16.3
  Top Layer w0.254: Boot.1@34.085,32.068 40.585,32.068 41.207,32.69 44.882,32.69 45.35,32.222 R18.1
  Top Layer w0.5: R18.1 45.692,31.852 J2.11
BLEP1.5: J2.10
BLEP1.6: J2.5
BLEP1.7: J2.4
BLEP2.0: J2.3
BLEP2.1: J2.2
BLEP2.2: J2.1
BLERST: J2.24
BLERX: J2.21 P6.3 U1.30 | length 57.4
  Top Layer w0.254: P6.3@34.569,40.919 34.773,40.919 36.379,42.526 38.222,42.526 39.719,44.023 39.719,51.364 41.056,52.701 U1.30
  Top Layer w0.5: v1(54.356,30.201) 55.067,30.201 55.905,29.362 J2.21
  Bottom Layer w0.5: P6.3 34.595,39.243 35.433,38.405 42.088,38.405 42.977,37.516 42.977,31.674 44.577,30.074 44.704,30.201 v1(54.356,30.201)
BLESCL(D+): C16.1 J2.8 R16.2 | length 45.2
  Top Layer w0.5: R16.2 11.593,31.394 30.937,31.394 32.004,32.461 32.004,37.49 32.715,38.202 44.196,38.202 45.2,37.198 C16.1 46.177,36.398 46.914,35.662 J2.8
BLESDA(D-): C15.1 J2.9 R17.2 | length 40.1
  Top Layer w0.254: v1@37.313,34.265 41.631,34.265 42.494,35.128 44.806,35.128 45.2,34.734 C15.1
  Top Layer w0.5: R17.2 11.568,35.56 v1(29.972,35.56) ; C15.1 46.401,33.879 46.914,34.392 J2.9
  Bottom Layer w0.254: v1(29.972,35.56) 31.242,34.29 v1(37.363,34.29)
BLETX: J2.20 P6.4 U1.31 | length 51.8
  Top Layer w0.254: P6.4@37.186,40.869 37.207,40.869 40.173,43.835 40.173,51.176 41.199,52.201 U1.31
  Top Layer w0.5: J2.20 v1@54.635,27.635
  Bottom Layer w0.5: P6.4 37.135,39.751 37.617,39.268 42.57,39.268 43.993,37.846 43.993,32.995 45.288,31.699 54.559,31.699 55.524,30.734 55.524,28.524 v1(54.686,27.686)
BOOT0: R5.2 U1.44 | length 12
  Top Layer w0.254: U1.44 50.737,49.378 50.267,49.848 50.267,50.571 50.8,51.105 52.019,51.105 52.832,50.292 52.832,49.606 55.55,46.888 R5.2
BOOT1: P5.12 R6.2 U1.20 | length 29.9
  Top Layer w0.254: P5.12@33.934,64.059 P5.12@34.163,63.83 ; P5.12@34.061,63.729 37.802,59.988 48.021,59.988 49.237,58.772 U1.20 49.237,55.27 48.45,54.483 47.219,54.483 46.914,54.788 46.914,55.524 45.644,56.794 R6.2
BUZZER: P5.10 R13.1 U1.18 | length 36.4
  Top Layer w0.254: P5.10@39.116,63.627 41.847,60.896 48.397,60.896 50.237,59.056 U1.18 50.237,54.936 v1(49.2,53.899)
  Top Layer w0.5: R13.1 37.338,49.654 v1(37.338,53.873)
  Bottom Layer w0.5: v1(37.338,53.873) v1@49.2,53.873
C13: P6.17 U1.2 | length 19.6
  Top Layer w0.254: U1.2@54.661,50.216 54.686,50.19 57.633,50.19 65.126,42.697 68.732,42.697 70.155,41.275 P6.17
GND: "ON  OFF.3" Boot.2 BT1.2 C1.2 C2.2 C5.2 C6.2 C7.2 C8.2 C10.2 C11.2 C12.2 C13.2 C14.2 C15.2 C16.2 C17.2 C18.2 C19.2 C20.2 C21.2 D1.2 J1.3 J2.7 J3.5 P1.3 P1.5 P9.1 P9.2 P9.3 P9.4 P9.5 POWER.2 Q1.E R1.1 R4.1 R6.1 R14.2 R21.2 R22.2 U1.23 U1.35 U1.47 U2.1 U2.2 U3.1 U3.15 U3.17 U3.18 U4.3 U4.4 U4.5 U5.1 U6.1 U7.1 U8.1 U9.1 U10.1 USB1.4 USB1.5 USB1.6 | length 85.8
  Top Layer w0.254: R6.1 40.299,57.977 40.894,58.572 47.396,58.572 47.737,58.232 U1.23 47.737,55.514 v1@47.777,55.474 ; v6(40.767,9.728) 40.767,10.618 40.424,10.961 ; U3.18 40.424,10.961 ; U3.17 C18.2@39.466,12.26 ; U3.15 40.464,13.26 39.636,12.433 C18.2 C18.2@39.466,12.26 ; v1(42.291,7.569) 42.307,7.553 U4.5 U4.4 ; U3.1 48.6,11.76 J3.5 ; U1.35 v1(47.97,50.201) ; v1(48.668,38.302) 51.233,38.302 J2.7 ; v1(51.384,50.165) 51.613,50.165 52.237,49.541 U1.47 ; C18.2@39.466,12.26 39.294,12.088 C17.2 40.424,10.961
  Top Layer w0.3: U4.4 U4.3 41.057,1.412 41.275,1.194 43.586,1.194 C21.2@44.406,2.013
  Top Layer w0.5: C1.2 11.913,29.274 ; U2.2 U2.1 11.799,29.16 11.913,29.274 ; D1.2 23.257,29.274 C7.2 C8.2 C6.2 C5.2 C2.2 11.913,29.274 ; Q1.E 33.806,48.462 R14.2 ; v1(38.894,19.171) C20.2@39.91,19.171 ; C21.2@44.406,2.013 C21.2 ; C14.2@63.348,58.408 C13.2@65.38,58.408 ; C11.2 C12.2
  Top Layer w1: POWER.2 7.188,15.875 7.974,15.089 7.974,11.1 7.974,10.031 ; C20.2@39.91,19.171 C20.2 ; C19.2 43.528,19.671 R22.2 v1(46.798,19.671) ; R1.1 61.495,57.658 62.296,58.459 C14.2
  other v1: 62.7,1.448 56.439,1.524 56.286,9.042 57.379,18.72 41.681,28.031 33.299,29.896 21.234,44.323 2.616,54.559 47.752,55.27 34.62,55.321 7.468,58.039 2.438,58.293 70.231,58.522 7.925,64.389
MPU_AD0: R22.1 U3.9 | length 3.7
  Top Layer w0.254: U3.9 43.528,16.223 44.069,16.764 45.06,16.764 45.237,16.942 R22.1@45.237,17.515
MPU_CLKOUT: U3.22
MPU_ES_CL: U3.7
MPU_ES_DA: U3.6
MPU_FSYNC: U3.11
MPU_INT: P6.12 U1.41 U3.12 | length 60.4
  Top Layer w0.254: U3.12 42.028,16.366 41.783,16.612 41.783,20.345 42.215,20.777 61.239,20.777 61.697,21.234 61.697,38.151 60.528,39.319 58.953,39.319 P6.12@57.455,40.818 ; U1.41 49.237,45.595 51.789,43.044 55.229,43.044 P6.12@57.455,40.818 ; P6.12 P6.12@57.455,40.818
MPU_SCL: J3.3 P6.13 R23.2 U1.42 U3.23 U4.8 | length 79.7
  Top Layer w0.254: U4.8 38.557,7.696 39.345,8.484 41.91,8.484 42.647,9.22 44.475,9.22 ; U3.23 44.028,9.667 44.475,9.22 ; R23.2 45.706,9.006 45.491,9.22 44.475,9.22 ; U1.42 49.737,45.737 51.977,43.498 57.391,43.498 60.046,40.843 P6.13
  Top Layer w0.5: R23.2 47.117,7.976 48.057,7.036 48.956,7.036 J3.3 ; v3(52.197,7.112) 62.103,7.112 62.154,7.061 63.264,8.172 63.264,37.574 P6.13
  Bottom Layer w0.5: J3.3 49.019,7.061 49.07,7.112 v3(52.197,7.112)
MPU_SDA: J3.2 P6.14 R24.2 U1.43 U3.24 U4.7 | length 95.9
  Top Layer w0.254: v1(39.776,7.366) 39.776,7.264 39.807,7.234 U4.7 ; U3.24 44.528,10.056 44.856,9.728 46.533,9.728 47.93,8.331 50.114,8.331 50.521,7.925 50.521,5.131 49.93,4.54 ; U1.43 50.237,45.879 52.165,43.952 59.376,43.952 P6.14@62.535,40.792
  Top Layer w0.5: R24.2 46.371,4.54 J3.2 49.93,4.54 63.519,4.54 65.024,6.045 65.024,38.303 62.535,40.792 P6.14
  Bottom Layer w0.254: v1(39.776,7.366) 39.776,7.264 v1@39.827,7.214
  Bottom Layer w0.5: v1(39.776,7.366) 42.602,4.54 J3.2
MPU_SDO: U4.6
NetC11_1: C11.1 U1.3 Y1.1 | length 10.5
  Top Layer w0.254: U1.3 59.306,50.701 Y1.1
  Top Layer w0.5: Y1.1 61.658,48.616 C11.1
NetC12_1: C12.1 U1.4 Y1.2 | length 17.3
  Top Layer w0.254: U1.4 60.446,51.201 Y1.2
  Top Layer w0.5: Y1.2 67.702,50.256 68.568,49.39 C12.1
NetC13_1: C13.1 U1.5 Y2.1 | length 19.4
  Top Layer w0.254: U1.5 67.449,51.701 68.275,52.527 Y2.1
  Top Layer w0.5: C13.1@65.38,56.73 68.25,53.86 Y2.1@68.25,53.619
NetC14_1: C14.1 U1.6 Y2.2 | length 12.7
  Top Layer w0.254: U1.6 62.539,52.201 63.275,52.937 Y2.2
  Top Layer w0.5: Y2.2@63.348,53.645 C14.1@63.348,56.73
NetC17_1: C17.1 U3.20 | length 4.8
  Top Layer w0.254: C17.1@39.319,9.461 39.738,9.042 41.69,9.042 42.528,9.881 U3.20
NetC19_1: C19.1 U3.10 | length 2.3
  Top Layer w0.254: U3.10 C19.1@43.028,17.314
NetC21_2: 
NetD1_1: D1.1 R2.2 | length 2.3
  Top Layer w0.5: R2.2 23.512,26.046 D1.1
NetD2_2: PAIR.2 R19.2 | length 4.1
  Top Layer w0.5: PAIR.2 40.139,28.991 R19.2
NetD3_2: LINK.2 R20.2 | length 4.3
  Top Layer w0.5: LINK.2 40.64,25.375 41.737,26.471 R20.2
NetF1_2: F1.2 R12.1 | length 9.4
  Top Layer w0.5: v1@24.015,47.51 R12.1
  Bottom Layer w0.5: F1.2 21.987,49.413 v1(23.952,47.447)
NetJ1_2: J1.2 R5.1 | length 12
  Top Layer w0.5: R5.1 59.65,46.025 v3@59.919,46.025
  Bottom Layer w0.5: v3(59.868,45.974) 68.504,45.974 68.961,45.517 J1.2@68.961,44.323
NetP10_1: P10.1 U5.5 U5.6 U5.7 U5.8 | length 6.9
  Top Layer w1: P10.1 26.327,5.69 26.353,5.715 ; U5.8 U5.7 U5.6 26.353,5.715 ; U5.5 26.353,5.715
NetP10_2: P10.2 U6.5 U6.6 U6.7 U6.8 | length 7.1
  Top Layer w1: U6.5 U6.6 ; U6.8 U6.7 U6.6 ; P10.2 20.725,3.15 U6.6
NetP11_1: P11.1 U7.5 U7.6 U7.7 U7.8 | length 6.9
  Top Layer w1: P11.1 26.188,11.646 26.353,11.811 ; U7.8 U7.7 U7.6 26.353,11.811 ; U7.5 26.353,11.811
NetP11_2: P11.2 U8.5 U8.6 U8.7 U8.8 | length 6.9
  Top Layer w1: U8.5 20.205,9.119 ; U8.8 U8.7 U8.6 20.205,9.119 ; P11.2 20.218,9.106 20.205,9.119
NetP12_1: P12.1 U9.5 U9.6 U9.7 U9.8 | length 6.9
  Top Layer w1: P12.1 26.277,17.602 26.353,17.678 ; U9.8 U9.7 U9.6 26.353,17.678 ; U9.5 26.353,17.678
NetP12_2: P12.2 U10.5 U10.6 U10.7 U10.8 | length 6.9
  Top Layer w1: U10.5 20.205,15.062 ; U10.8 U10.7 U10.6 20.205,15.062 ; P12.2 20.205,15.062
NetQ1_B: Q1.B R13.2 R14.1 | length 4.3
  Top Layer w0.5: Q1.B@31.828,46.61 R14.1 R13.2
NetQ1_C: Q1.C R12.2 | length 2.1
  Top Layer w0.5: R12.2@27.607,47.498 Q1.C
NetR0_2: R0.2 U2.8 | length 2.5
  Top Layer w0.5: U2.8 19.064,26.035 R0.2
NetR4_2: R4.2 RST.2 | length 8.9
  Top Layer w0.5: RST.2@2.548,49.526 2.548,43.026 2.616,42.958 R4.2
NetR15_1: R15.1 R16.1 USB1.3 | length 5.1
  Top Layer w0.254: USB1.3 9.442,31.745 R16.1 R15.1
NetR17_1: R17.1 USB1.2 | length 6.1
  Top Layer w0.254: USB1.2 7.986,32.395 8.433,32.842 8.433,35.636 8.661,35.865 R17.1
NRST: C10.1 P1.10 R3.1 RST.1 U1.7 | length 64.2
  Top Layer w0.254: v1(50.902,52.654) 50.948,52.701 U1.7
  Top Layer w0.5: C10.1 7.048,38.784 RST.1@7.048,43.026 ; RST.1@7.048,49.526 RST.1@7.048,43.026 ; v3@17.094,43.917 16.204,43.026 RST.1@7.048,43.026 ; P1.10 21.013,50.985 33.688,50.985 v1(34.087,51.384)
  Bottom Layer w0.5: v3(17.196,44.145) P1.10 ; v1(34.087,51.384) 49.682,51.384 50.902,52.603 v1(50.902,52.654)
SFR_MODE: J3.4
VBAT: BT1.1 U1.1 | length 7
  Top Layer w0.254: U1.1 56.014,49.701 56.845,48.87 v1(57.429,48.87)
  Bottom Layer w0.5: v1(57.429,48.87) 58.115,49.555 BT1.1
VCC: "ON  OFF.1" C1.1 P7.1 P7.2 P7.3 P7.4 P7.5 S3.2 S3.5 U2.3 U2.4 | length 63.7
  Top Layer w0.5: v1(8.398,37.465) 11.674,40.742 P7.1 P7.2 P7.3 P7.4 P7.5 ; 9.728,23.095 9.728,27.254 C1.1@10.248,27.774
  Top Layer w1: 2.667,11.074 2.591,11.074 0.906,12.759 0.906,22.674 1.327,23.095 S3.2 9.728,23.095 11.793,23.095 11.799,23.089 U2.4@11.799,22.454
  Bottom Layer w0.5: S3.5@6.94,23.095 7.906,23.095 8.56,23.749 8.56,26.137 7.804,26.892 7.804,36.872 v1(8.398,37.465)
VCCM: "ON  OFF.2" R25.2 R26.1 R27.2 R28.1 R29.2 R30.1 U5.3 U6.3 U7.3 U8.3 U9.3 U10.3 | length 91.5
  Top Layer w0.5: R26.1 12.977,3.67 U6.3 ; R28.1 12.977,9.626 U8.3 ; R30.1 12.977,15.582 U10.3 ; U5.3 33.581,5.17 R25.2 ; U7.3 R27.2@33.581,11.126 ; U9.3 33.581,17.082 R29.2
  Top Layer w1: 5.207,11.074 5.385,10.897 5.385,9.728 10.846,4.267 ; R26.1 11.593,3.52 10.846,4.267 ; R28.1 11.406,9.476 10.846,8.915 ; R30.1 11.419,15.432 10.846,14.859 10.846,8.915 ; R25.2 35.038,5.32 35.623,4.734 ; R27.2 34.825,11.276 35.623,10.477 ; R29.2 34.635,17.232 35.623,16.243 35.623,10.477 ; 10.846,4.267 10.846,1.372 11.336,0.881 34.765,0.881 35.623,1.74 35.623,4.734 ; 10.846,4.267 10.846,8.915 ; 35.623,4.734 35.623,10.477
VDDA: C9.1 L1.2 P5.1 U1.9 | length 16
  Top Layer w0.254: U1.9 56.393,53.701 57.506,54.813 57.506,60.427 58.623,61.544 61.759,61.544 C9.1 61.773,63.754 P5.1
VIN: POWER.1 S3.3 S3.4 | length 9.8
  Top Layer w1: POWER.1@2.667,15.875 2.667,20.868 2.44,21.095 S3.4@6.94,21.095
VSSA: C9.2 R1.2 U1.8 | length 11.7
  Top Layer w0.254: U1.8 56.655,53.201 59.665,56.21 59.665,57.644 R1.2 59.679,58.46 60.046,58.826 61.189,58.826 61.773,59.411 C9.2
pads on no net: g1.1 g2.1 g3. g4.1 J3. P1.7 U3.2 U3.4 U3.5 U3.14 U3.16 U3.19 U3.21 USB1.0 Y1.3
copper on no net:
  other v2: 3,0.95 68,0.95 68,0.95 1.536,1.536 4.464,1.536 66.536,1.536 66.536,1.536 69.464,1.536 69.464,1.536 0.95,3 5.05,3 65.95,3 65.95,3 70.05,3 70.05,3 1.536,4.464 4.464,4.464 66.536,4.464 66.536,4.464 69.464,4.464 69.464,4.464 3,5.05 68,5.05 68,5.05 50,14.95 48.536,15.536 51.464,15.536 47.95,17 52.05,17 48.536,18.464 51.464,18.464 50,19.05 3,60.95 68,60.95 1.536,61.536 4.464,61.536 66.536,61.536 69.464,61.536 0.95,63 5.05,63 65.95,63 70.05,63 1.536,64.464 4.464,64.464 66.536,64.464 69.464,64.464 3,65.05 68,65.05

## Polygon pours and split planes (outlines as drawn)
GND on Top Layer "Top Layer-No Net" (hatched 45Degree grid 0.508 track 0.203, remove dead copper, pour order 37): 0.025,66.091 0.076,66.04 0.076,0 73,0 73.05,-0.051 73.05,66.091 72.949,66.192 0.127,66.192 0.025,66.091
GND on Top Layer "Top Overlay-No Net" (solid, remove dead copper, pour order 6): 0.025,12.471 0.025,0.025 0.013,0.013 0.025,0 36.855,0 36.855,20.574 8.56,20.574 8.534,20.599 8.534,12.471 0.025,12.471
GND on Bottom Layer "Top Layer-No Net" (hatched 45Degree grid 0.508 track 0.203, remove dead copper, pour order 39): 0.025,66.015 0.025,0.025 0,0 0.203,0.203 73.025,0.203 73.025,65.913 72.873,66.065 -0.051,66.065

## Keep-outs
Keep-Out Layer:
  lines w0.254: 0.025,0 73.025,0 73.025,66.116 0.025,66.116 0.025,0

## Other copper
Top Layer:
  pour cut-out: 11.799,26.035 11.799,22.25 16.573,22.25 16.599,22.225 16.599,26.035
  pour cut-out: 45.387,55.201 45.387,49.701 47.237,47.851 52.737,47.851 54.587,49.701 54.587,55.201 52.737,57.051 47.189,57.051 45.339,55.201
  pour cut-out: 0,0 -0.025,-0.025 37.287,-0.025 37.287,20.803 8.128,20.803 8.128,14.757 7.823,14.453 0,14.453 -0.051,14.402 0,14.351
  pour cut-out: 66.853,22.439 66.853,0.025 73,0.025 73.025,0 73.025,22.454 66.868,22.454
  text "Niu.151020" at 8.331,60.935 h1.5
Bottom Layer:
  pour cut-out: 1.067,9.525 9.754,9.525 9.754,12.725 1.067,12.725
  pour cut-out: 66.853,22.439 66.853,0.025 73,0.025 73.025,0 73.025,22.454 66.868,22.454

## Silkscreen, mask and mechanical layers (free items; w line width, h text height)
Top Overlay:
  drawing of 1394 lines, arcs and shapes, not listed
  text "AirshipBoard Ver:0.95" at 31.699,59.004 h1.5
  text "L" at 64.237,42.545 h1.52
  text "H" at 71.806,41.834 h1.52
  text "3.3V" at 27.407,35.916 h1.2
  text "GND" at 27.381,31.801 h1.2
Bottom Overlay:
  drawing of 1392 lines, arcs and shapes, not listed
  text "P5:" at 14.619,43.84 h2
  text "VDDA" at 13.832,42.152 h1.2
  text "A0" at 13.832,39.599 h1.2
  text "C13" at 71.298,38.405 h1.2 r270
  text "B9" at 66.269,37.948 h1.2 r270
  text "B3" at 51.816,37.518 h1.2 r270
  text "B8" at 64.516,37.518 h1.2 r270
  text "B4" at 54.356,37.46 h1.2 r270
  text "A8" at 31.496,37.392 h1.2 r270
  text "A1" at 13.832,37.046 h1.2
  text "A11" at 39.116,37.026 h1.2 r270
  text "B15" at 28.956,36.638 h1.2 r270
  text "A12" at 41.656,36.512 h1.2 r270
  text "A13" at 44.196,36.512 h1.2 r270
  text "A15" at 49.276,36.512 h1.2 r270
  text "A14" at 46.736,36.455 h1.2 r270
  text "BleTX" at 36.576,35.381 h1.2 r270
  text "BleRX" at 34.036,35.255 h1.2 r270
  text "A2" at 13.832,34.494 h1.2
  text "MPU_INT" at 57.296,32.679 h1.2 r270
  text "A3" at 13.832,31.941 h1.2
  text "MPU_SCL" at 59.836,31.913 h1.2 r270
  text "MPU_SDA" at 62.376,31.81 h1.2 r270
  text "A4" at 13.832,29.388 h1.2
  text "A5" at 13.832,26.836 h1.2
  text "A6" at 13.832,24.283 h1.2
  text "A7" at 13.832,21.73 h1.2
  text "Buzzer" at 13.832,19.177 h1.2
  text "B1" at 13.832,16.625 h1.2
  text "BOOT1" at 13.832,14.072 h1.2
  text "B10" at 13.832,11.519 h1.2
  text "B11" at 13.832,8.967 h1.2
  text "B12" at 13.832,6.414 h1.2
  text "B13" at 13.832,3.861 h1.2
  text "B14" at 13.832,1.309 h1.2

## Text inside footprints (layer, text, board x,y; h text height)
J3: Top Overlay "VCC" at 56.286,2.718 h1.52; Top Overlay "SDA/RX" at 53.518,4.674 h1.52; Top Overlay "SCL/TX" at 52.981,6.844 h1.52; Top Overlay "Mode" at 51.74,9.068 h1.52; Top Overlay "GND" at 51.918,11.659 h1.52
P1: Top Overlay "10" at 18.161,45.542 h1.27 r270; Top Overlay "9" at 14.148,45.644 h1.27 r270; Top Overlay "1" at 14.148,59.36 h1.27 r270; Top Overlay "2" at 16.688,59.868 h1.27 r270